# Altium PCB XDS100v3.PcbDoc
Units mil, origin at the board's own origin, x right, y up, seen from the top; angles counter-clockwise.
Board outline 6000 x 4000 mil, 2 copper layers (Top Layer, Bottom Layer); 102 components, 73 nets, 442 pads, 0 vias.
Unrouted connection lines stored in the file: 206.
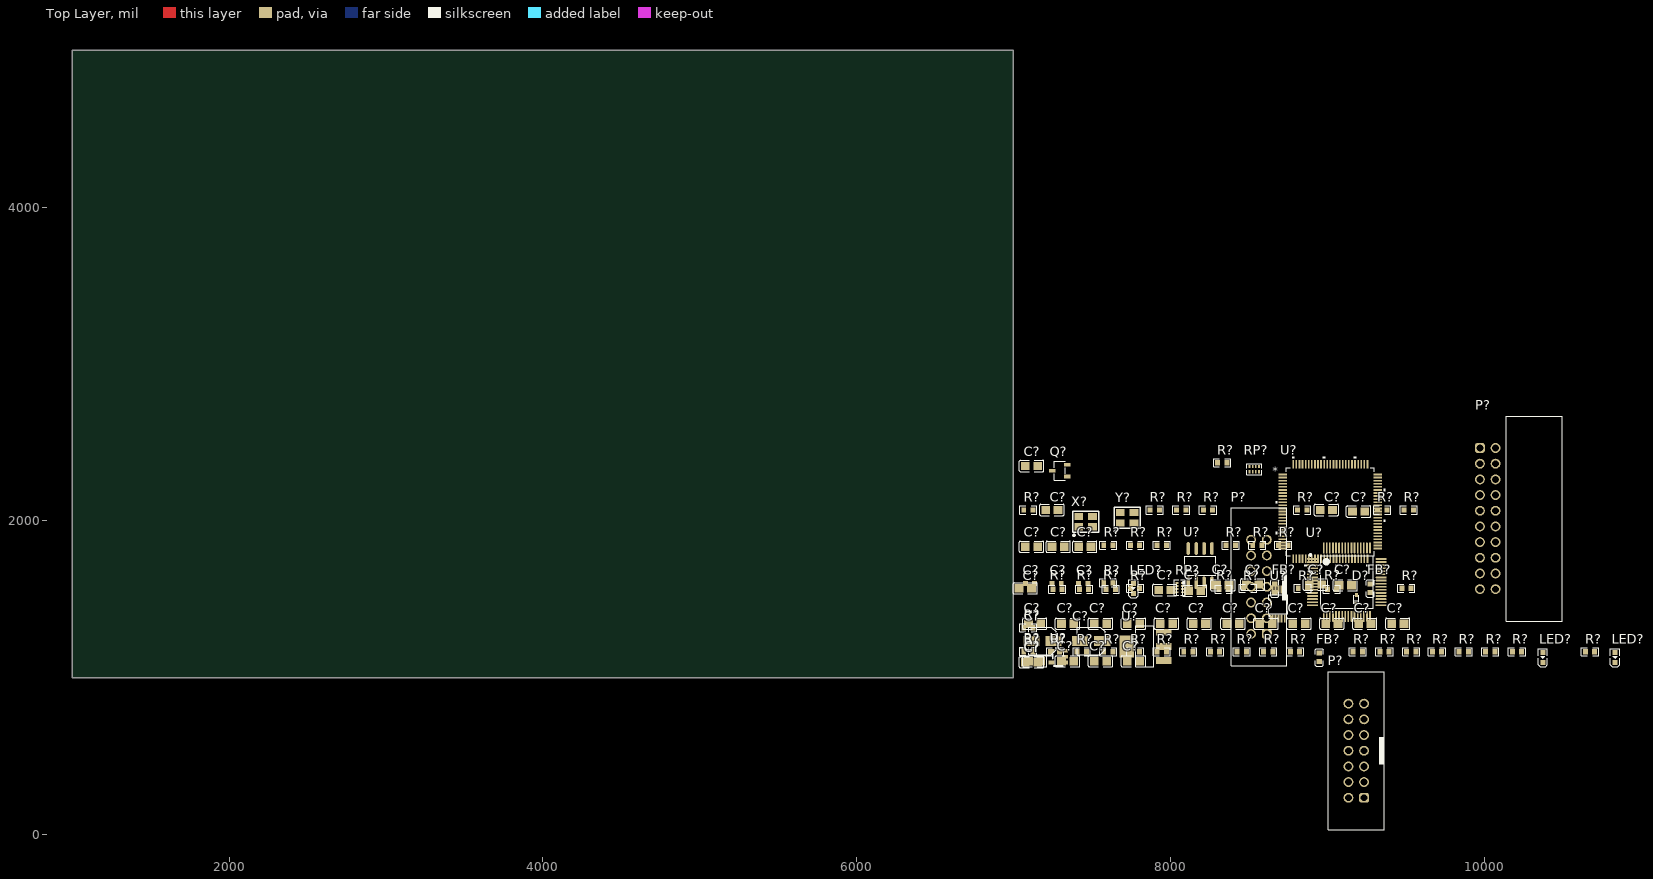
[diagram p0: Top Layer view]
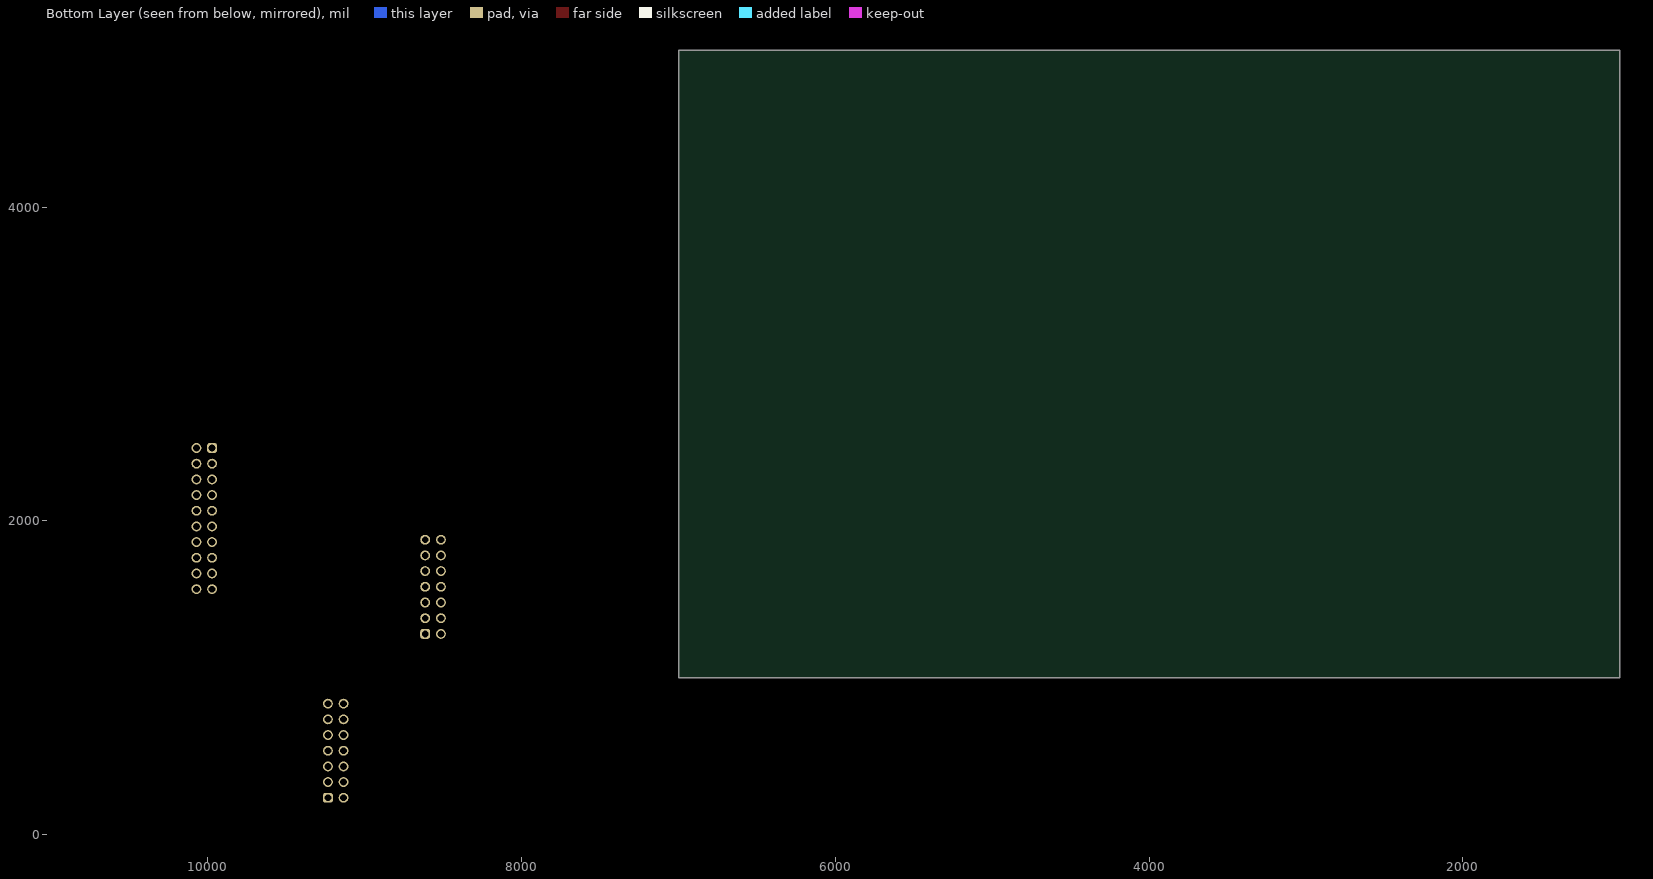
[diagram p1: Bottom Layer view, seen from below]

## Layer stack, top to bottom
Top Solder: solder mask 0.4, Solder Resist, Dk 3.5
Top Layer: signal copper 1.4
Dielectric 1: dielectric 12.6, FR-4, Dk 4.8
Bottom Layer: signal copper 1.4
Bottom Solder: solder mask 0.4, Solder Resist, Dk 3.5

## Board outline
1000,1000 7000,1000 7000,5000 1000,5000

## Design rules (kind name [scope] priority, off if disabled: settings)
Clearance [All] p1: gap=10 ignorepadtopadclearanceinfootprint=FALSE except(0: Arc-Hole Track-Hole SMDPad-Hole THPad-Hole Via-Hole Fill-Hole Poly-Hole Region-Hole Text-Hole)
PolygonConnect [All] p1: connectstyle=Relief reliefconductorwidth=10 reliefentries=4 polygonreliefangle="90 Angle" airgapwidth=10
RoutingVias [All] p1: holewidth=28 width=50 viastyle="Through Hole" minholewidth=28 minwidth=50 maxholewidth=28 maxwidth=50
SolderMaskExpansion [All] p1: expansion=4 istentingtop=FALSE
Width [All] p1: maxlimit=10 minlimit=10 preferedwidth=10
30 further rules are at their usual default settings.

## Classes and differential pairs
component class Power: C? R? U?
component class UART: C? FB? LED? R? RP? U? X?
component class FPGA: C? FB? LED? R? U? Y?
component class Port: P? R? RP?
component class Others: C? D? Q? R? U?

## Components (designator, comment, footprint, x,y, rotation, side; value= is the part's Value field where it differs from the comment)
C? "F ±5%_X7R" C0805 7555,1345 r0 top
C? "F ±5%_X7R" C0805 7765,1345 r0 top
C? "F ±5%_X7R" C0805 9450,1345 r0 top
C? "F ±5%_X7R" C0805 7345,1345 r0 top
C? "F ±5%_X7R" C0805 7135,1105 r0 top
C? "F ±5%_X7R" C0805 7555,1105 r0 top
C? "F ±5%_X7R" C0805 7345,1105 r0 top
C? "F ±5%_X7R" C0805 7765,1105 r0 top
C? "F ±5%_X7R" C0805 9240,1345 r0 top
C? "F ±5%_X7R" C0805 8185,1345 r0 top
C? "F ±5%_X7R" C0805 8610,1345 r0 top
C? "F ±5%_X7R" C0805 7135,1345 r0 top
C? "F ±5%_X7R" C0805 9030,1345 r0 top
C? "F ±5%_X7R" C0805 7975,1345 r0 top
C? "F ±5%_X7R" C0805 8820,1345 r0 top
C? "F ±5%_X7R" C0805 8400,1345 r0 top
C? "F ±5%_X7R" C0805 7285,1835 r0 top
C? "F ±5%_X7R" C0805 7455,1835 r0 top
C? "F ±5%_X7R" C0805 7115,1835 r0 top
C? "10µF" WCAP-ASNP_D4H5.5 7185,1235 r0 top
C? "22µF" WCAP-ASNP_D4H5.5 7495,1235 r0 top
C? "F ±5%_X7R" C0805 7115,1100 r0 top
C? "4.7µF" WCAP-CSGP_0603_L1.6W0.8H0.8_Reflow 7105,1600 r0 top
C? "F ±5%_X7R" C0805 8525,1595 r0 top
C? "4.7µF" WCAP-CSGP_0603_L1.6W0.8H0.8_Reflow 7445,1600 r0 top
C? "F ±5%_X7R" C0805 8925,1595 r0 top
C? "F ±5%_X7R" C0805 8335,1590 r0 top
C? "F ±5%_X7R" C0805 9115,1590 r0 top
C? "4.7µF" WCAP-CSGP_0603_L1.6W0.8H0.8_Reflow 7275,1600 r0 top
C? "F ±5%_X7R" C0805 7245,2070 r0 top
C? "F ±5%_X7R" C0805 8995,2070 r0 top
C? "F ±5%_X7R" C0805 9200,2060 r0 top
C? "F ±5%_X7R" C0805 7115,2350 r0 top
C? "F ±5%_X7R" C0805 7965,1560 r0 top
C? "F ±5%_X7R" C0805 7075,1570 r0 top
C? "F ±5%_X7R" C0805 8155,1555 r0 top
D? "1N4148" SOD-523F 9185,1500 r90 top
FB? "?Ω@100MHz" L0603 9275,1570 r90 top
FB? "?Ω@100MHz" L0603 8665,1570 r90 top
FB? "?Ω@100MHz" L0603 8950,1130 r90 top
LED? "LED" LED0603-RD 7765,1570 r90 top
LED? "LED" LED0603-RD 10835,1130 r90 top
LED? "LED" LED0603-RD 10375,1130 r90 top
P? "61201421621" 61201421621 8565,1580 r90 top
P? "61201421621" 61201421621 9185,535 r90 top
P? "61202021721" 61202021721 10320,2015 r90 top
Q? "SS8050" SOT-23-3_L2.9-W1.6-P1.90-LS2.8-BR 7295,2320 r0 top
R? "Ω ±1% 100mW" R0603 8555,1845 r0 top
R? "Ω ±1% 100mW" R0603 8720,1845 r0 top
R? "Ω ±1% 100mW" R0603 7095,1170 r0 top
R? "Ω ±1% 100mW" R0603 7605,1845 r0 top
R? "Ω ±1% 100mW" R0603 8385,1845 r0 top
R? "Ω ±1% 100mW" R0603 7945,1845 r0 top
R? "Ω ±1% 100mW" R0603 7775,1845 r0 top
R? "Ω ±1% 100mW" R0603 7095,1320 r0 top
R? "Ω ±1% 100mW" R0603 7605,1605 r0 top
R? "Ω ±1% 100mW" R0603 8840,2070 r0 top
R? "Ω ±1% 100mW" R0603 7095,2070 r0 top
R? "Ω ±1% 100mW" R0603 8070,2070 r0 top
R? "Ω ±1% 100mW" R0603 9520,2070 r0 top
R? "Ω ±1% 100mW" R0603 9350,2070 r0 top
R? "Ω ±1% 100mW" R0603 7900,2070 r0 top
R? "Ω ±1% 100mW" R0603 8240,2070 r0 top
R? "Ω ±1% 100mW" R0603 10675,1165 r0 top
R? "Ω ±1% 100mW" R0603 7095,1165 r0 top
R? "Ω ±1% 100mW" R0603 7775,1165 r0 top
R? "Ω ±1% 100mW" R0603 9365,1165 r0 top
R? "Ω ±1% 100mW" R0603 9535,1165 r0 top
R? "Ω ±1% 100mW" R0603 9700,1165 r0 top
R? "Ω ±1% 100mW" R0603 7605,1165 r0 top
R? "Ω ±1% 100mW" R0603 10210,1165 r0 top
R? "Ω ±1% 100mW" R0603 9195,1165 r0 top
R? "Ω ±1% 100mW" R0603 9870,1165 r0 top
R? "Ω ±1% 100mW" R0603 7945,1165 r0 top
R? "Ω ±1% 100mW" R0603 8115,1165 r0 top
R? "Ω ±1% 100mW" R0603 8455,1165 r0 top
R? "Ω ±1% 100mW" R0603 8795,1165 r0 top
R? "Ω ±1% 100mW" R0603 7265,1165 r0 top
R? "Ω ±1% 100mW" R0603 7435,1165 r0 top
R? "Ω ±1% 100mW" R0603 10040,1165 r0 top
R? "Ω ±1% 100mW" R0603 8285,1165 r0 top
R? "Ω ±1% 100mW" R0603 8625,1165 r0 top
R? "Ω ±1% 100mW" R0603 7620,1565 r0 top
R? "Ω ±1% 100mW" R0603 9505,1570 r0 top
R? "Ω ±1% 100mW" R0603 8845,1570 r0 top
R? "Ω ±1% 100mW" R0603 8340,1565 r0 top
R? "Ω ±1% 100mW" R0603 7280,1565 r0 top
R? "Ω ±1% 100mW" R0603 9030,1565 r0 top
R? "Ω ±1% 100mW" R0603 7775,1570 r0 top
R? "Ω ±1% 100mW" R0603 8495,1570 r0 top
R? "Ω ±1% 100mW" R0603 7450,1565 r0 top
R? "Ω ±1% 100mW" R0603 8330,2370 r0 top
RP? "Ω ±1% 100mW" RES-ARRAY-SMD_0402-8P-L2.0-W1.0-BL 8060,1575 r90 top value=30Ω
RP? "Ω ±1% 100mW" RES-ARRAY-SMD_0402-8P-L2.0-W1.0-BL 8535,2330 r0 top value=30Ω
U? "TLV70015" SOT-23-5_L2.9-W1.6-P0.95-LS2.8-BR 7285,1135 r0 top
U? "FT2232H" LQFP-64_L10.0-W10.0-P0.50-LS12.0-TL 9125,1610 r0 top
U? "AT93C46DN" SOIC-8_L4.9-W3.9-P1.27-LS6.0-BL 8190,1715 r0 top
U? "1117" SOT-223-3 7840,1200 r0 top
U? "OPA2363IDGSR" VSSOP-10_L3.0-W3.0-P0.50-LS4.9-BL 8690,1470 r0 top
U? "A3P125-VQ100" VQ100_MCH 9020,2060 r0 top
X? "100.000MHz ±10ppm_10pF" OSC-SMD_4P-L3.2-W2.5-BL_SIT8008BI 7460,1995 r0 top value=100MHz
Y? "100.000MHz ±10ppm_10pF" OSC-SMD_4P-L3.2-W2.5-BL_SIT8008BI 7725,2020 r0 top value=100MHz

## Footprints (in the part's own frame and the unit in brackets; to place one, negate y for a bottom-side part, rotate by r counter-clockwise, add the part's x,y. Pads: shape width x height; smd on the part's side, far side on the other; paste and mask are expansions set on the pad)
61201421621 [mm] "14 pins, straight, gold plating"
  rrect50% 1.6x1.6 hole 1.1: 1(-7.62,-1.27)
  round 1.6 hole 1.1: 2(-7.62,1.27) 3(-5.08,-1.27) 4(-5.08,1.27) 5(-2.54,-1.27) 6(-2.54,1.27) 7(0,-1.27) 8(0,1.27) 9(2.54,-1.27) 10(2.54,1.27) 11(5.08,-1.27) 12(5.08,1.27) 13(7.62,-1.27) 14(7.62,1.27)
  silkscreen extent -12.82,-4.5 12.82,4.5, body extent -12.72,-4.42 12.72,4.75, height 9.13
61202021721 [mm] "20 pins, right angled, gold plating"
  rrect50% 1.6x1.6 hole 1.1: 1(11.43,8.805)
  round 1.6 hole 1.1: 2(11.43,6.265) 3(8.89,8.805) 4(8.89,6.265) 5(6.35,8.805) 6(6.35,6.265) 7(3.81,8.805) 8(3.81,6.265) 9(1.27,8.805) 10(1.27,6.265) 11(-1.27,8.805) 12(-1.27,6.265) 13(-3.81,8.805) 14(-3.81,6.265) 15(-6.35,8.805) 16(-6.35,6.265) 17(-8.89,8.805) 18(-8.89,6.265) 19(-11.43,8.805) 20(-11.43,6.265)
  silkscreen extent -16.61,-4.5 16.61,4.5, body extent -16.53,-4.42 16.53,9.13, height 9.23
C0805 [mm]
  rect 1.41x1.35 smd mask+0.051: 1(-1,0) 2(1,0)
  silkscreen extent -1.96,-0.9 1.96,0.9, body extent -1,-0.66 1,0.64, height 1.3
L0603 [mm]
  rect 0.8x0.864 smd paste-100 mask+0.051: 1(-0.7,0) 2(0.7,0)
  silkscreen extent -1.42,-0.65 1.41,0.67
LED0603-RD [mm]
  rect 0.8x0.8 smd paste+0 mask+0.051: 1(-0.799,-0.003) 2(0.799,0.003)
  silkscreen extent -1.49,-0.75 1.39,0.76
LQFP-64_L10.0-W10.0-P0.50-LS12.0-TL [mm]
  oval 1.8x0.28 smd paste+0 mask+0.05: 1(-5.55,3.75) 2(-5.55,3.25) 3(-5.55,2.75) 4(-5.55,2.25) 5(-5.55,1.75) 6(-5.55,1.25) 7(-5.55,0.75) 8(-5.55,0.25) 9(-5.55,-0.25) 10(-5.55,-0.75) 11(-5.55,-1.25) 12(-5.55,-1.75) 13(-5.55,-2.25) 14(-5.55,-2.75) 15(-5.55,-3.25) 16(-5.55,-3.75) 33(5.55,-3.75) 34(5.55,-3.25) 35(5.55,-2.75) 36(5.55,-2.25) 37(5.55,-1.75) 38(5.55,-1.25) 39(5.55,-0.75) 40(5.55,-0.25) 41(5.55,0.25) 42(5.55,0.75) 43(5.55,1.25) 44(5.55,1.75) 45(5.55,2.25) 46(5.55,2.75) 47(5.55,3.25) 48(5.55,3.75)
  oval 0.28x1.8 smd paste+0 mask+0.05: 17(-3.75,-5.55) 18(-3.25,-5.55) 19(-2.75,-5.55) 20(-2.25,-5.55) 21(-1.75,-5.55) 22(-1.25,-5.55) 23(-0.75,-5.55) 24(-0.25,-5.55) 25(0.25,-5.55) 26(0.75,-5.55) 27(1.25,-5.55) 28(1.75,-5.55) 29(2.25,-5.55) 30(2.75,-5.55) 31(3.25,-5.55) 32(3.75,-5.55) 49(3.75,5.55) 50(3.25,5.55) 51(2.75,5.55) 52(2.25,5.55) 53(1.75,5.55) 54(1.25,5.55) 55(0.75,5.55) 56(0.25,5.55) 57(-0.25,5.55) 58(-0.75,5.55) 59(-1.25,5.55) 60(-1.75,5.55) 61(-2.25,5.55) 62(-2.75,5.55) 63(-3.25,5.55) 64(-3.75,5.55)
  silkscreen extent -6.05,-4.25 4.25,4.55
OSC-SMD_4P-L3.2-W2.5-BL_SIT8008BI [mm]
  rect 1.4x1.2 smd: 1(-1.1,-0.85) 2(1.1,-0.85) 3(1.1,0.85) 4(-1.1,0.85)
  silkscreen extent -2.1,-2.35 2.1,1.7
R0603 [mil]
  rect 31.75x34.02 smd mask+2: 1(-29.66,0) 2(29.66,0)
  silkscreen extent -55,-26 55,26, body extent -33,-16 31,16, height 18
RES-ARRAY-SMD_0402-8P-L2.0-W1.0-BL [mm]
  rect 0.3x0.505 smd: 1(-0.75,0.427) 2(-0.25,0.427) 3(0.25,0.427) 4(0.75,0.427) 5(0.75,-0.427) 6(0.25,-0.427) 7(-0.25,-0.427) 8(-0.75,-0.427)
  silkscreen extent -1.23,-0.91 1.23,0.91
SOD-523F [mil] "L1.2-W0.8-LS1.7-RD"
  rect 24x19 smd: 1(-27.87,0.08) 2(28,-0.19)
  silkscreen extent -29,-19 26,19, body extent -31,-16 31,15, height 24
SOIC-8_L4.9-W3.9-P1.27-LS6.0-BL [mm]
  oval 0.588x2.045 smd: 1(-1.905,-2.772) 2(-0.635,-2.772) 3(0.635,-2.772) 4(1.905,-2.772) 5(1.905,2.772) 6(0.635,2.772) 7(-0.635,2.772) 8(-1.905,2.772)
  silkscreen extent -2.8,-2.92 2.53,1.52
SOT-23-3_L2.9-W1.6-P1.90-LS2.8-BR [mm]
  rect 1.07x0.6 smd: 1(1.235,-0.95) 2(1.235,0.95) 3(-1.235,0)
  silkscreen extent -0.88,-1.54 0.88,1.54
SOT-23-5_L2.9-W1.6-P0.95-LS2.8-BR [mm]
  rect 1x0.6 smd paste+0 mask+0.05: 1(1.1,-0.95) 2(1.1,0) 3(1.1,0.95) 4(-1.1,0.95) 5(-1.1,-0.95)
  silkscreen extent -0.89,-1.52 0.7,1.4
SOT-223-3 [mm] "L6.5-W3.4-P2.30-LS7.0-BR"
  rect 2.5x1.1 smd mask+0.051: 1(2.97,-2.3) 2(2.97,0) 3(2.97,2.3)
  rect 2.34x3.6 smd mask+0.051: 4(-2.97,0)
  silkscreen extent -1.57,-3.33 1.37,3.33, body extent -3.57,-3.25 3.54,3.25, height 1.75
VQ100_MCH [mil]
  rect 53.5x11 smd paste+0 mask+0: 1(-302.25,236.22) 2(-302.25,216.54) 3(-302.25,196.85) 4(-302.25,177.17) 5(-302.25,157.48) 6(-302.25,137.8) 7(-302.25,118.11) 8(-302.25,98.43) 9(-302.25,78.74) 10(-302.25,59.06) 11(-302.25,39.37) 12(-302.25,19.69) 13(-302.25,0) 14(-302.25,-19.68) 15(-302.25,-39.37) 16(-302.25,-59.06) 17(-302.25,-78.74) 18(-302.25,-98.43) 19(-302.25,-118.11) 20(-302.25,-137.8) 21(-302.25,-157.48) 22(-302.25,-177.17) 23(-302.25,-196.85) 24(-302.25,-216.54) 25(-302.25,-236.22) 51(302.25,-236.22) 52(302.25,-216.54) 53(302.25,-196.85) 54(302.25,-177.17) 55(302.25,-157.48) 56(302.25,-137.8) 57(302.25,-118.11) 58(302.25,-98.43) 59(302.25,-78.74) 60(302.25,-59.06) 61(302.25,-39.37) 62(302.25,-19.68) 63(302.25,0) 64(302.25,19.68) 65(302.25,39.37) 66(302.25,59.06) 67(302.25,78.74) 68(302.25,98.43) 69(302.25,118.11) 70(302.25,137.8) 71(302.25,157.48) 72(302.25,177.17) 73(302.25,196.85) 74(302.25,216.54) 75(302.25,236.22)
  rect 11x53.5 smd paste+0 mask+0: 26(-236.22,-302.25) 27(-216.54,-302.25) 28(-196.85,-302.25) 29(-177.17,-302.25) 30(-157.48,-302.25) 31(-137.8,-302.25) 32(-118.11,-302.25) 33(-98.43,-302.25) 34(-78.74,-302.25) 35(-59.06,-302.25) 36(-39.37,-302.25) 37(-19.68,-302.25) 38(0,-302.25) 39(19.68,-302.25) 40(39.37,-302.25) 41(59.06,-302.25) 42(78.74,-302.25) 43(98.43,-302.25) 44(118.11,-302.25) 45(137.8,-302.25) 46(157.48,-302.25) 47(177.17,-302.25) 48(196.85,-302.25) 49(216.54,-302.25) 50(236.22,-302.25) 76(236.22,302.25) 77(216.54,302.25) 78(196.85,302.25) 79(177.17,302.25) 80(157.48,302.25) 81(137.8,302.25) 82(118.11,302.25) 83(98.43,302.25) 84(78.74,302.25) 85(59.06,302.25) 86(39.37,302.25) 87(19.68,302.25) 88(0,302.25) 89(-19.68,302.25) 90(-39.37,302.25) 91(-59.06,302.25) 92(-78.74,302.25) 93(-98.43,302.25) 94(-118.11,302.25) 95(-137.8,302.25) 96(-157.48,302.25) 97(-177.17,302.25) 98(-196.85,302.25) 99(-216.54,302.25) 100(-236.22,302.25)
  silkscreen extent -349,-349 349,349, body extent -315,-315 315,315, height 47
VSSOP-10_L3.0-W3.0-P0.50-LS4.9-BL [mm]
  rect 0.3x1.3 smd paste+0 mask+0.015: 1(-1,-2.35) 2(-0.5,-2.35) 3(0,-2.35) 4(0.5,-2.35) 5(1,-2.35)
  rect 0.3x1.3 smd: 6(1,2.35) 7(0.5,2.35) 8(0,2.35) 9(-0.5,2.35) 10(-1,2.35)
  silkscreen extent -1.62,-2.08 1.52,1.54
WCAP-ASNP_D4H5.5 [mm] "Aluminum Electrolytic Capacitors, 4x5.5mm"
  rect 2.6x1.6 smd: 1(1.8,0) 2(-1.8,0)
  silkscreen extent -2.25,-2.25 2.25,2.25, body extent -2.5,-2.15 2.5,2.15, height 5.5
WCAP-CSGP_0603_L1.6W0.8H0.8_Reflow [mm] "Ceramic Capacitors, body 1.6x0.8mm"
  rect 0.8x0.8 smd: 1(-0.75,0) 2(0.75,0)
  body extent -0.8,-0.4 0.8,0.4, height 0.8

## Part data
C? C? C? C? C? C? C? C? C? C? C? C? C? C? C? C? C? C? C? C? C? C? C? C? C? C? C? C? C? C? C?: library part Cap, "Capacitor", LatestRevisionDate=17-Jul-2002, LatestRevisionNote="Re-released for DXP Platform.", PackageDescription="Radial Cap, Thru-Hole; 2 Leads; 0.3 in Pin Spacing", PackageReference=RAD-0.3, Published=8-Jun-2000, Publisher="Altium Limited"
C?: library part 865250240001, "WCAP-ASNP Aluminum Electrolytic Capacitor, V-Chip, SMT, D4 x H5.5mm, 10µF, 10V", Capacitance Tolerance=+/-20%, Case/Size Code="D4 x H5.5mm", Leakage Current=10µA, Manufacturer="Wurth Elektronik", Operating Temperature Max=85°C, Operating Temperature Min=-40°C, Rated Voltage (DC)=10V, Ripple Current=17mA, Capacitance=10µF, Category="Aluminum Electrolytic Capacitors", ComponentLink1Description="Website Link", ComponentLink1URL=https://www.we-online.com/redexpert/article/865250240001?ad, ComponentLink2Description="Datasheet Link", ComponentLink2URL=https://www.we-online.com/redexpert/spec/865250240001?ad, Diameter=4mm, Dissipation Factor=20%, Endurance=2000h, Height=5.5mm, Manufacturer Part Number=865250240001, Match Code=WCAP-ASNP, Mount="Surface Mount", Packaging="Tape and Reel", Technical Reference=ASBB055100M010DVCTAB000
C?: library part 865250140002, "WCAP-ASNP Aluminum Electrolytic Capacitor, V-Chip, SMT, D4 x H5.5mm, 22µF, 6.3V", Capacitance Tolerance=+/-20%, Case/Size Code="D4 x H5.5mm", Leakage Current=10µA, Manufacturer="Wurth Elektronik", Operating Temperature Max=85°C, Operating Temperature Min=-40°C, Rated Voltage (DC)=6.3V, Ripple Current=28mA, Capacitance=22µF, Category="Aluminum Electrolytic Capacitors", ComponentLink1Description="Website Link", ComponentLink1URL=https://www.we-online.com/redexpert/article/865250140002?ad, ComponentLink2Description="Datasheet Link", ComponentLink2URL=https://www.we-online.com/redexpert/spec/865250140002?ad, Diameter=4mm, Dissipation Factor=24%, Endurance=2000h, Height=5.5mm, Manufacturer Part Number=865250140002, Match Code=WCAP-ASNP, Mount="Surface Mount", Packaging="Tape and Reel", Technical Reference=ASBB055220M6R3DVCTAB000
C? C? C?: library part 885012106005, "WCAP-CSGP Multilayer Ceramic Chip Capacitor, General Purpose, size 0603, X5R, 4.7µF, 6.3VDC", Capacitance Tolerance=+/-20%, Case/Size Code=0603, Insulation Resistance=0.02GΩ, Manufacturer="Wurth Elektronik", Operating Temperature Max=85°C, Operating Temperature Min=-55°C, Rated Voltage (DC)=6.3V, Capacitance=4.7µF, Category="Multilayer Ceramic Chip Capacitors", Ceramic Type=X5R, ComponentLink1Description="Website Link", ComponentLink1URL=https://www.we-online.com/redexpert/article/885012106005?ad, ComponentLink2Description="Datasheet Link", ComponentLink2URL=https://www.we-online.com/redexpert/spec/885012106005?ad, Dissipation Factor=10%, Height=0.8mm, Length=1.6mm, Manufacturer Part Number=885012106005, Match Code=WCAP-CSGP, Mount="Surface Mount", Packaging="Tape and Reel", Technical Reference=X5R0603475M6R3DFCT10000, Width=0.8mm
D?: "High Conductance Fast Diode", Code_JEDEC=DO-204-AH, ComponentLink1Description="Manufacturer Link", ComponentLink1URL=http://www.fairchildsemi.com/, ComponentLink2Description=Datasheet, ComponentLink2URL=http://www.fairchildsemi.com/ds/1N%2F1N4148.pdf, DatasheetVersion=1997, LatestRevisionDate=17-Jul-2002, LatestRevisionNote="Re-released for DXP Platform.", PackageDescription="Diode, Axial; Body 3.8 x 1.9 mm (LxDia. max), Lead Dia. 0.53 mm (max)", PackageReference=DO-35, Published=8-Jun-2000, Publisher="Altium Limited"
FB? FB? FB?: library part "Ferrite Bead", "标称阻抗@测试频率:600Ω@100MHz;误差:±25%;直流电阻(RDC):250mΩ;额定电流:2A", Current Rating=2A, DC Resistance=250mΩ, Impedance @ Frequency=600Ω@100MHz, JLCPCB Part Class="Extended Part", LCSC Part Name="600Ω@100MHz ±25%", Manufacturer=FH(风华), Manufacturer Part=CBW321609U601T, Tolerance=±25%, Add into BOM=yes, Circuits=1, Convert to PCB=yes, Datasheet=https://atta.szlcsc.com/upload/public/pdf/source/20160606/1465200211209.pdf, Device=CBW321609U601T, Name=CBW321609U601T, Supplier=LCSC, Supplier Footprint=SMD, Supplier Part=C73732, Symbol=CBW321609U601T
LED? LED? LED?: "发光颜色:", Emitted Color=红灯, JLCPCB Part Class="Extended Part", Manufacturer=EVERLIGHT(亿光), Manufacturer Part=17-21SURC/S530-A2/TR8, Add into BOM=yes, Convert to PCB=yes, Datasheet=https://atta.szlcsc.com/upload/public/pdf/source/20170918/C131244_1505726880590976254.pdf, Device=17-21SURC/S530-A2/TR8, LCSC Part Name=红灯, Name=17-21SURC/S530-A2/TR8, Supplier=LCSC, Supplier Footprint=0805, Supplier Part=C131244, Symbol=17-21SURC/S530-A2/TR8
P? P?: "WR-BHD Male Box Header, THT Straight, pitch 2.54mm, 2 Row, 14 pin", Contact Resistance=20mOhm, Insulation Resistance=1000MOhm, Manufacturer="Wurth Elektronik", Operating Temperature Max=105°C, Operating Temperature Min=-40°C, Rated Current=3A, Withstanding Voltage=500V, Working Voltage=250V, Category="Wire-to-Board Connectors", ComponentLink1Description="Website Link", ComponentLink1URL=https://www.we-online.com/redexpert/article/61201421621?ad, ComponentLink2Description="Datasheet Link", ComponentLink2URL=https://www.we-online.com/redexpert/spec/61201421621?ad, Gender=Male, Height=9.1mm, Length=25.44mm, Manufacturer Part Number=61201421621, Match Code=WR-BHD, Mount="Through Hole", Number of Pins=14, Number of Rows=2, Orientation=Straight, Packaging=Tray, Pitch=2.54mm, Width=9.1mm
P?: "WR-BHD Male Box Header, THT Right Angle, pitch 2.54mm, 2 Row, 20 pin", Contact Resistance=20mOhm, Insulation Resistance=1000MOhm, Manufacturer="Wurth Elektronik", Operating Temperature Max=105°C, Operating Temperature Min=-40°C, Rated Current=3A, Withstanding Voltage=500V, Working Voltage=250V, Category="Wire-to-Board Connectors", ComponentLink1Description="Website Link", ComponentLink1URL=https://www.we-online.com/redexpert/article/61202021721?ad, ComponentLink2Description="Datasheet Link", ComponentLink2URL=https://www.we-online.com/redexpert/spec/61202021721?ad, Gender=Male, Height=9.1mm, Length=33.06mm, Manufacturer Part Number=61202021721, Match Code=WR-BHD, Mount="Through Hole", Number of Pins=20, Number of Rows=2, Orientation="Right Angle", Packaging=Tray, Pitch=2.54mm, Width=13.23mm
Q?: Collector Current (Ic)=1.5A, Collector Cut-Off Current (Icbo)=100nA, Collector-Emitter Breakdown Voltage (Vceo)=25V, Collector-Emitter Saturation Voltage (VCE(sat)@Ic,Ib)=500mV@800mA,80mA, DC Current Gain (hFE@Ic,Vce)=200@100mA,1V, JLCPCB Part Class="Basic Part", LCSC Part Name="NPN 25V 1.5A Y1 200-350", Manufacturer=CJ(江苏长电/长晶), Operating Temperature=+150℃@(Tj), Power Dissipation (Pd)=300mW, Transition Frequency (fT)=100MHz, Add into BOM=yes, Convert to PCB=yes, Datasheet=https://atta.szlcsc.com/upload/public/pdf/source/20230322/AEE86F4B043774EFF80CAEA14A37D9E9.pdf, Device=SS8050_C2150, Manufacturer Part=SS8050, Name=SS8050, Supplier=LCSC, Supplier Footprint=SOT-23, Supplier Part=C2150, Symbol=SS8050_C2150, Transistor Type=NPN
R? R? R? R? R? R? R? R? R? R? R? R? R? R? R? R? R? R? R? R? R? R? R? R? R? R? R? R? R? R? R? R? R? R? R? R? R? R? R? R? R? R? R? R? R?: library part Res, "Resistor", LatestRevisionDate=17-Jul-2002, LatestRevisionNote="Re-released for DXP Platform.", PackageDescription="Axial Device, Thru-Hole; 2 Leads; 0.3 in Pin Spacing", PackageReference=AXIAL-0.3, Published=8-Jun-2000, Publisher="Altium Limited"
RP? RP?: library part RP, JLCPCB Part Class="Extended Part", LCSC Part Name="30Ω ±5% 0402x4", Manufacturer=YAGEO(国巨), Manufacturer Part=YC124-JR-0730RL, Number of Resistors=4, Power(Watts)=62.5mW, Temperature Coefficient=±200ppm/℃, Tolerance=±5%, Add into BOM=yes, Convert to PCB=yes, Datasheet=https://atta.szlcsc.com/upload/public/pdf/source/20171116/C136847_15108221195481123713.pdf, Device=YC124-JR-0730RL, Name=30Ω, Number of Pins=8, Supplier=LCSC, Supplier Footprint=0402x4, Supplier Part=C136847, Symbol=YC124-JR-0730RL
U?: Dropout Voltage=250mV@(200mA), JLCPCB Part Class="Extended Part", LCSC Part Name=TLV70015DDCR, Manufacturer=TI(德州仪器), Maximum Input Voltage=5.5V, Operating Temperature=-40℃~+125℃@(Tj), Output Current=200mA, Output Voltage=1.5V, Power Supply Rejection Ratio (PSRR)=68dB@(1kHz), Quiescent Current (Ground Current)=55uA, Add into BOM=yes, Convert to PCB=yes, Datasheet=https://atta.szlcsc.com/upload/public/pdf/source/20230221/CBA3FAF2ECD8317094AE1D26AA0CA23B.pdf, Device=TLV70015DDCR, Manufacturer Part=TLV70015DDCR, Name=TLV70015DDCR, Number of Outputs=1, Output Polarity=正, Output Type=固定, Supplier=LCSC, Supplier Footprint=SOT-23-Thin-5, Supplier Part=C2865100, Symbol=TLV70015DDCR
U?: JLCPCB Part Class="Extended Part", LCSC Part Name=FT2232HL-REEL, Manufacturer=FTDI(飞特帝亚), Supply Voltage=-, Add into BOM=yes, Convert to PCB=yes, Data Rate=-, Datasheet=https://atta.szlcsc.com/upload/public/pdf/source/20140319/1457707024994.pdf, Device=FT2232HL-REEL, Manufacturer Part=FT2232HL-REEL, Name=FT2232HL-REEL, Number of Drivers/Receivers=-, Protocol=-, Supplier=LCSC, Supplier Footprint=LQFP-64(10x10), Supplier Part=C27882, Symbol=FT2232HL, Type=-
U?: JLCPCB Part Class="Extended Part", LCSC Part Name=AT93C46DN-SH-T, Manufacturer=MICROCHIP(美国微芯), Operating Temperature=-40℃~+85℃, Supply Voltage=1.8V~5.5V, Add into BOM=yes, Convert to PCB=yes, Datasheet=https://atta.szlcsc.com/upload/public/pdf/source/20210201/C6499_C0D2958C2C3F034123F82B64259CD392.pdf, Device=AT93C46DN-SH-T, Interface Type=SPI, Manufacturer Part=AT93C46DN-SH-T, Memory Size=1Kbit, Name=AT93C46DN-SH-T, Supplier=LCSC, Supplier Footprint=SOP-8, Supplier Part=C6499, Symbol=AT93C46DN-SH-T
U?: library part OPA2363, JLCPCB Part Class="Extended Part", Manufacturer=TI(德州仪器), Add into BOM=yes, Convert to PCB=yes, Datasheet=https://atta.szlcsc.com/upload/public/pdf/source/20180227/C181294_15196973833841369920.pdf, Device=OPA2363IDGSR, Gain Bandwidth Product(GBP)=7MHz, LCSC Part Name=OPA2363IDGSR, Manufacturer Part=OPA2363IDGSR, Name=OPA2363IDGSR, Number of Circuits=2, Slew Rate(SR)=5V/us, Supplier=LCSC, Supplier Footprint=VSSOP-10-0.5mm, Supplier Part=C181294, Symbol=OPA2363IDGSR
U?: "https://www.microchip.com/en-us/product/A3P125#", Mfr_Name=Microchip, RefDes=RefDes, Type=Type
X? Y?: library part oscillator, Frequency Stability=±20ppm, JLCPCB Part Class="Extended Part", LCSC Part Name="3225 100MHz 1.8~3.3V 20ppm  OE  SMD_4P -40~+105℃", Manufacturer=EPSON(爱普生), Manufacturer Part="SG-8101CE 100.000000MHz TCHPA", Operating Temperature=-40℃~+105℃, Supply Voltage=1.8V~3.3V, Add into BOM=yes, Convert to PCB=yes, Datasheet=https://atta.szlcsc.com/upload/public/pdf/source/20190626/C390559_D0305530A2A3721045533DB4F9788766.pdf, Device="SG-8101CE 100.000000MHz TCHPA", Name=100MHz, Supplier=LCSC, Supplier Footprint=SMD3225-4P, Supplier Part=C390559, Symbol=SG-8101CE-100.000000MHZ-TCHPA

## Nets (pads, with @x,y where several pads share a name; then routed paths per layer and width w, separated by ;. In a path a pad name is that pad's centre, name@x,y a point inside that pad or via, vN(x,y) a via of type N, cw(c..) or ccw(c..) an arc to the next point about the centre after c; other vN are vias at no path point)
+1V5: C?.2@7154.37,1835 C?.2@7324.37,1835 C?.2@7474.53,1600 C?.2@7494.37,1835 C?.2@7804.37,1105 FB?.1@8950,1102.44 U?.17@8717.75,1981.26 U?.37@9000.32,1757.75 U?.68 U?.89
+1V8: C?.2@7304.53,1600 C?.2@8649.37,1345 C?.2@8859.37,1345 C?.2@9069.37,1345 C?.2@9279.37,1345 D?.2
+3V3: C?.1@7075.63,1100 C?.2@7134.53,1600 C?.2@7174.37,1345 C?.2@7384.37,1345 C?.2@7594.37,1345 C?.2@7804.37,1345 C?.2@8014.37,1345 C?.2@9489.37,1345 FB?.1@9275,1542.44 FB?.2@8665,1597.56 R?.1@7065.34,1165 R?.1@7065.34,1170 R?.1@8810.34,2070 R?.1@10010.34,1165 R?.1@10645.34,1165 R?.2@7124.66,1320 R?.2@7294.66,1165 R?.2@7804.66,1570 R?.2@7929.66,2070 R?.2@7974.66,1845 R?.2@8099.66,2070 R?.2@8414.66,1845 R?.2@8584.66,1845 R?.2@8749.66,1845 R?.2@9534.66,1570 R?.2@10239.66,1165 RP?.5@8076.83,1604.53 RP?.6 RP?.7 RP?.8 U?.18@8717.75,1961.57 U?.24@8717.75,1843.46 U?.39@9039.68,1757.75 U?.50@9256.22,1757.75 U?.56@9322.25,1922.2 Y?.4
ADV_MODE: LED?.2@10834.86,1161.47 U?.92
CBL_DIS: RP?.2@8043.17,1565.16 U?.21@8717.75,1902.52
CLK_FAIL: RP?.4@8043.17,1604.53 U?.41@9079.06,1757.75
DTS_EMU0: P?.13@9235,835 P?.13@9973.35,1865 R?.2@7974.66,1165
DTS_EMU1: P?.14@9135,835 P?.14@10073.35,1865 R?.2@7634.66,1165
DTS_EMU2_RXD: P?.17 R?.2@9564.66,1165
DTS_EMU3_TXD: P?.18 R?.2@8359.66,2370
DTS_EMU4_CTS: P?.19 R?.2@9394.66,1165
DTS_nSRST: P?.15 R?.2@7804.66,1165
DTS_nTRST: P?.2@9135,235 P?.2@10073.35,2465 R?.2@9729.66,1165
DTS_RTCK: P?.9@9235,635 P?.9@9973.35,2065 R?.2@8314.66,1165
DTS_TCK: P?.11@9235,735 P?.11@9973.35,1965 R?.2@8144.66,1165
DTS_TDI: P?.3@9235,335 P?.3@9973.35,2365 R?.2@8654.66,1165
DTS_TDIS: P?.4@9135,335 P?.4@10073.35,2365 R?.1@10180.34,1165 U?.98
DTS_TDO: P?.7@9235,535 P?.7@9973.35,2165 R?.2@8484.66,1165
DTS_TMS: P?.1@9235,235 P?.1@9973.35,2465 R?.2@8824.66,1165 R?.2@9224.66,1165
DTS_TVD: R?.1@8465.34,1570 U?.78
DTSA_BYP_N: RP?.3@8043.17,1584.84 U?.20@8717.75,1922.2
EEPROM_CLK: R?.1@8525.34,1845
EEPROM_CS: R?.1@8355.34,1845
EEPROM_DATA: R?.2@7804.66,1845
EMU0: U?.30@8862.52,1757.75
EMU1: RP?.1@8043.17,1545.47 U?.22@8717.75,1882.83
EMU_EN: U?.31@8882.2,1757.75
EXT_EMU0: P?.13@8615,1880 R?.2@8869.66,2070 U?.13@8717.75,2060
EXT_EMU1: P?.14@8515,1880 R?.1@7065.34,1320 U?.10@8717.75,2119.06
EXT_nTRST: P?.2@8515,1280 RP?.4@8564.53,2346.83 U?.7@8717.75,2178.11
EXT_RTCK: R?.1@8210.34,2070 U?.15@8717.75,2020.63
EXT_SELECT: LED?.2@10374.86,1161.47 R?.2@9899.66,1165 U?.96
EXT_TCK: P?.11@8615,1780 R?.2@9549.66,2070
EXT_TDI: P?.3@8615,1380 RP?.2@8525.16,2346.83 U?.5@8717.75,2217.48
EXT_TDIS: P?.4@8515,1380 U?.8@8717.75,2158.43
EXT_TDO: P?.7@8615,1580 U?.3@8717.75,2256.85
EXT_TMS: P?.1@8615,1280 RP?.1@8505.47,2346.83 U?.6@8717.75,2197.8
EXT_TVD: P?.5@8615,1480 RP?.3@8544.84,2346.83 U?.4@8717.75,2237.17
GND: C?.1@7035.63,1570 C?.1@7075.47,1600 C?.1@7075.63,1835 C?.1@7075.63,2350 C?.1@7095.63,1345 C?.1@7205.63,2070 C?.1@7245.47,1600 C?.1@7245.63,1835 C?.1@7305.63,1345 C?.1@7415.47,1600 C?.1@7415.63,1835 C?.1@7515.63,1105 C?.1@7515.63,1345 C?.1@7725.63,1105 C?.1@7725.63,1345 C?.1@7925.63,1560 C?.1@7935.63,1345 C?.1@8115.63,1555 C?.1@8145.63,1345 C?.1@8295.63,1590 C?.1@8360.63,1345 C?.1@8485.63,1595 C?.1@8570.63,1345 C?.1@8780.63,1345 C?.1@8885.63,1595 C?.1@8955.63,2070 C?.1@8990.63,1345 C?.1@9075.63,1590 C?.1@9160.63,2060 C?.1@9200.63,1345 C?.1@9410.63,1345 C?.2@7154.37,1100 P?.8 P?.10 P?.12 P?.16 P?.20 R?.1@7065.34,2070 R?.1@7250.34,1565 R?.1@8815.34,1570 R?.1@9840.34,1165 R?.2@7464.66,1165 R?.2@7634.66,1845 R?.2@8369.66,1565 RP?.5@8564.53,2313.17 U?.1@8717.75,2296.22 U?.2@7328.31,1134.99 U?.4@8709.68,1377.48 U?.9@8717.75,2138.74 U?.12@8717.75,2079.69 U?.25@8717.75,1823.78 U?.38@9020,1757.75 U?.46@9177.48,1757.75 U?.51@9322.25,1823.78 U?.67 U?.75 U?.88 U?.99 Y?.2
IN+: C?.2@7114.37,1570 R?.2@7479.66,1565 U?.3@8690,1377.48 U?.7@8709.68,1562.52
INA-: R?.1@9475.34,1570 R?.2@8874.66,1570 U?.2@8670.32,1377.48
NetLED?_1: LED?.1@10375.14,1098.53 R?.2@10069.66,1165
NetP?_9: P?.9@8615,1680 R?.2@8269.66,2070
NetQ?_1: Q?.1 R?.1@9000.34,1565
NetR?_1: R?.1@7420.34,1565 R?.1@7590.34,1565 R?.2@7309.66,1565
NetR?_2: R?.2@9379.66,2070 Y?.3
OSC_IN: R?.1@9320.34,2070 U?.16@8717.75,2000.94
PD: P?.5@9235,435 P?.5@9973.35,2265 R?.2@7649.66,1565
POD_RLS: U?.23@8717.75,1863.15
PRG_nTRST: R?.1@7405.34,1165 U?.55@9322.25,1902.52
PRG_TCK: U?.42@9098.74,1757.75 U?.47@9197.17,1757.75
PRG_TDI: U?.44@9138.11,1757.75 U?.48@9216.85,1757.75
PRG_TDO: R?.1@7235.34,1165 U?.45@9157.8,1757.75 U?.54@9322.25,1882.83
PRG_TMS: R?.2@7124.66,1165 U?.43@9118.43,1757.75 U?.49@9236.54,1757.75
PWREN#: LED?.2@7764.86,1601.47
RESET_N: C?.2@7284.37,2070 R?.1@8040.34,2070 U?.19@8717.75,1941.89
RTCK: U?.29@8842.83,1757.75
SRST_IN: U?.27@8803.46,1757.75
SRST_OUT: U?.28@8823.15,1757.75
SUSPEND#: R?.2@7124.66,1170
SUSPEND#: U?.40@9059.37,1757.75
TCK: U?.36@8980.63,1757.75
TDI: U?.35@8960.94,1757.75
TDO: U?.34@8941.26,1757.75
TMS: U?.33@8921.57,1757.75
TRST_N: U?.32@8901.89,1757.75
TVD: U?.26@8783.78,1757.75
UART_EN_N: R?.1@7870.34,2070 R?.2@7124.66,2070 U?.11@8717.75,2099.37
VBUS: C?.2@7154.37,2350 C?.2@7594.37,1105 Q?.3 R?.1@7575.34,1605 U?.1@7328.31,1097.61 U?.10@8650.62,1562.52
VCCPLF: C?.2@9034.37,2070 C?.2@9239.37,2060 FB?.2@8950,1157.56 U?.14@8717.75,2040.32
VPHY: C?.2@8964.37,1595 C?.2@9154.37,1590 FB?.2@9275,1597.56
VPLL: C?.2@8374.37,1590 C?.2@8564.37,1595 FB?.1@8665,1542.44
VTARG: C?.2@8004.37,1560 C?.2@8194.37,1555 D?.1 Q?.2 R?.1@8310.34,1565 U?.8@8690,1562.52 U?.66 U?.74 U?.87 U?.100
pads on no net: C?.1@7095.63,1105 C?.1@7255.87,1235 C?.1@7305.63,1105 C?.1@7565.87,1235 C?.2@7114.13,1235 C?.2@7174.37,1105 C?.2@7384.37,1105 C?.2@7424.13,1235 C?.2@8224.37,1345 C?.2@8439.37,1345 LED?.1@7765.14,1538.53 LED?.1@10835.14,1098.53 P?.6 R?.1@7575.34,1165 R?.1@7575.34,1845 R?.1@7745.34,1165 R?.1@7745.34,1570 R?.1@7745.34,1845 R?.1@7915.34,1165 R?.1@7915.34,1845 R?.1@8085.34,1165 R?.1@8255.34,1165 R?.1@8300.34,2370 R?.1@8425.34,1165 R?.1@8595.34,1165 R?.1@8690.34,1845 R?.1@8765.34,1165 R?.1@9165.34,1165 R?.1@9335.34,1165 R?.1@9490.34,2070 R?.1@9505.34,1165 R?.1@9670.34,1165 R?.2@7634.66,1605 R?.2@8524.66,1570 R?.2@9059.66,1565 R?.2@10704.66,1165 U?.1@7956.93,1109.45 U?.1@8115,1605.85 U?.1@8650.64,1377.48 U?.1@8906.5,1757.64 U?.2@7956.93,1200 U?.2@8165,1605.85 U?.2@8717.75,2276.54 U?.2@8906.5,1737.95 U?.3@7328.31,1172.39 U?.3@7956.93,1290.55 U?.3@8215,1605.85 U?.3@8906.5,1718.27 U?.4@7241.69,1172.4 U?.4@7723.07,1200 U?.4@8265,1605.85 U?.4@8906.5,1698.58 U?.5@7241.69,1097.6 U?.5@8265,1824.15 U?.5@8729.38,1377.48 U?.5@8906.5,1678.9 U?.6@8215,1824.15 U?.6@8729.36,1562.52 U?.6@8906.5,1659.21 U?.7@8165,1824.15 U?.7@8906.5,1639.53 U?.8@8115,1824.15 U?.8@8906.5,1619.84 U?.9@8670.32,1562.52 U?.9@8906.5,1600.16 U?.10@8906.5,1580.47 U?.11@8906.5,1560.79 U?.12@8906.5,1541.1 U?.13@8906.5,1521.42 U?.14@8906.5,1501.73 U?.15@8906.5,1482.05 U?.16@8906.5,1462.36 U?.17@8977.36,1391.5 U?.18@8997.05,1391.5 U?.19@9016.73,1391.5 U?.20@9036.42,1391.5 U?.21@9056.1,1391.5 U?.22@9075.79,1391.5 U?.23@9095.47,1391.5 U?.24@9115.16,1391.5 U?.25@9134.84,1391.5 U?.26@9154.53,1391.5 U?.27@9174.21,1391.5 U?.28@9193.9,1391.5 U?.29@9213.58,1391.5 U?.30@9233.27,1391.5 U?.31@9252.95,1391.5 U?.32@9272.64,1391.5 U?.33@9343.5,1462.36 U?.34@9343.5,1482.05 U?.35@9343.5,1501.73 U?.36@9343.5,1521.42 U?.37@9343.5,1541.1 U?.38@9343.5,1560.79 U?.39@9343.5,1580.47 U?.40@9343.5,1600.16 U?.41@9343.5,1619.84 U?.42@9343.5,1639.53 U?.43@9343.5,1659.21 U?.44@9343.5,1678.9 U?.45@9343.5,1698.58 U?.46@9343.5,1718.27 U?.47@9343.5,1737.95 U?.48@9343.5,1757.64 U?.49@9272.64,1828.5 U?.50@9252.95,1828.5 U?.51@9233.27,1828.5 U?.52 U?.53 U?.54@9174.21,1828.5 U?.55@9154.53,1828.5 U?.56@9134.84,1828.5 U?.57 U?.58 U?.59 U?.60 U?.61 U?.62 U?.63 U?.64 U?.65 U?.69 U?.70 U?.71 U?.72 U?.73 U?.76 U?.77 U?.79 U?.80 U?.81 U?.82 U?.83 U?.84 U?.85 U?.86 U?.90 U?.91 U?.93 U?.94 U?.95 U?.97 X?.1 X?.2 X?.3 X?.4 Y?.1

## Text inside footprints (layer, text, board x,y; h text height)
U?: Top Overlay "*" at 8653.5,2296.06 h50; Top 3D Body "*" at 8747,2281.06 h50